# Altium PCB Rect.PcbDoc
Units mil, origin at the board's own origin, x right, y up, seen from the top; angles counter-clockwise.
Board outline 866.14 x 1968.5 mil, 2 copper layers (Top Layer, Bottom Layer); 54 components, 30 nets, 168 pads, 81 vias.
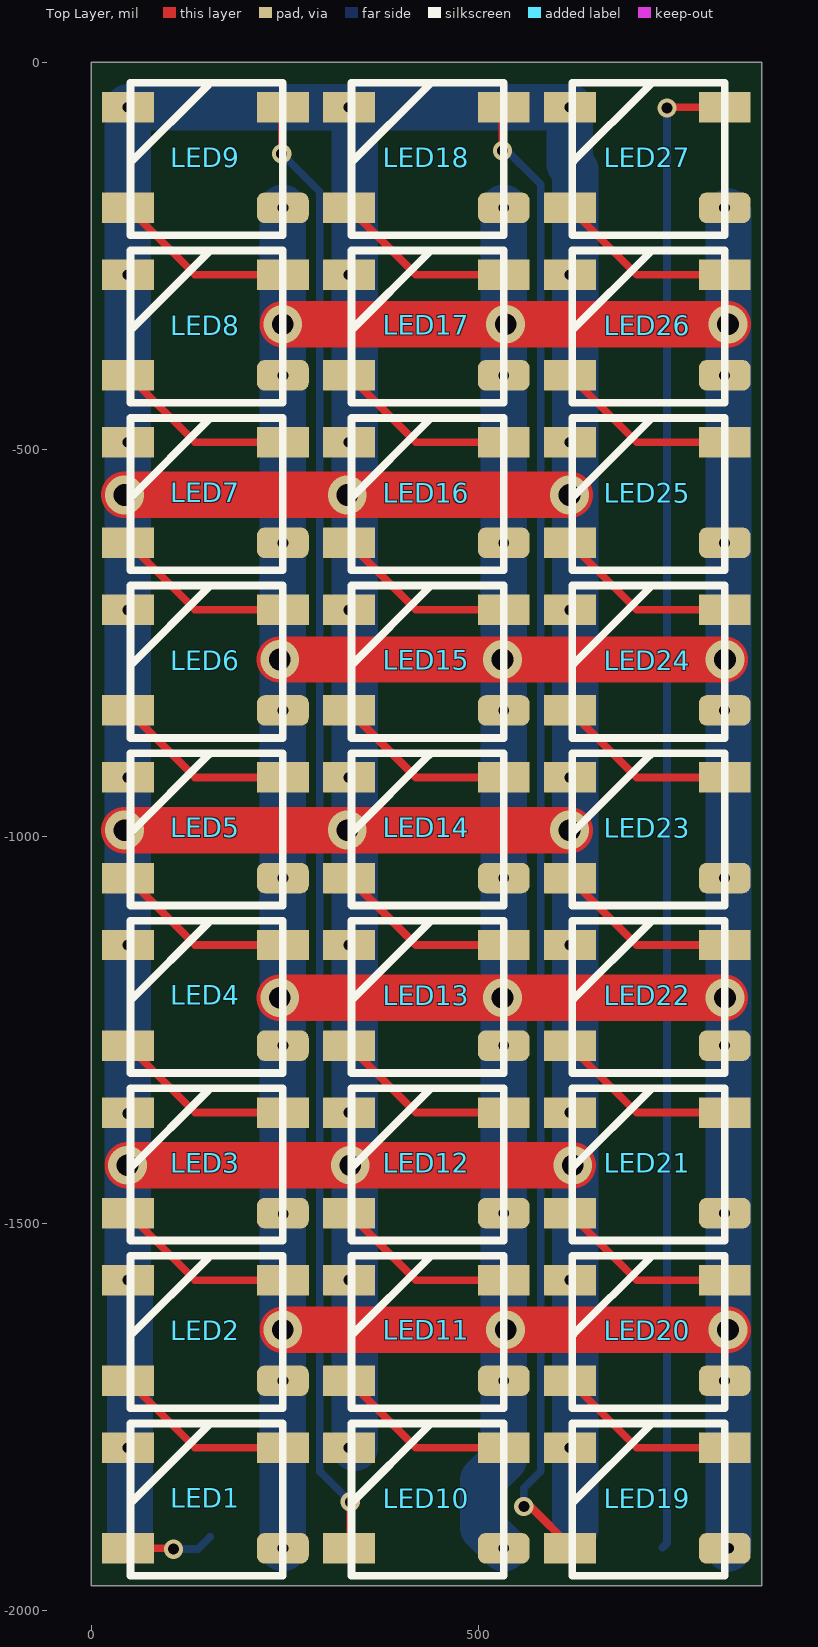
[diagram p0: Top Layer view]
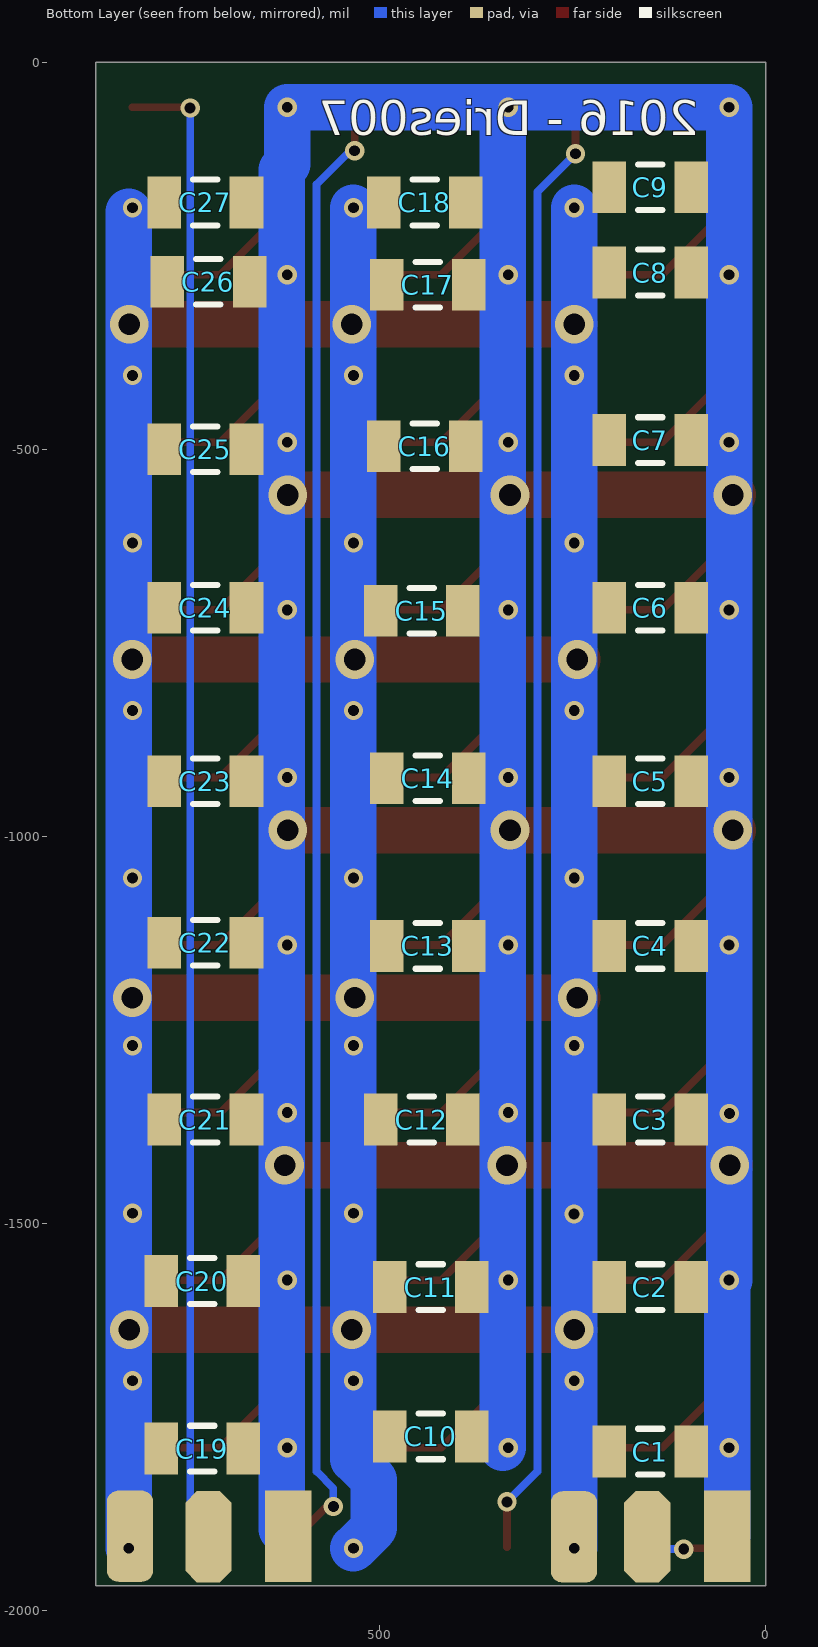
[diagram p1: Bottom Layer view, seen from below]

## Layer stack, top to bottom
Top Solder: solder mask 0.4, Solder Resist, Dk 3.5
Top Layer: signal copper 1.4
Dielectric 1: dielectric 12.6, FR-4, Dk 4.8
Bottom Layer: signal copper 1.4
Bottom Solder: solder mask 0.4, Solder Resist, Dk 3.5

## Board outline
0,-1968.5 866.14,-1968.5 866.14,0 0,0

## Design rules (kind name [scope] priority, off if disabled: settings)
Clearance [All] p1: gap=10
PolygonConnect [All] p1: connectstyle=Relief reliefconductorwidth=10 reliefentries=4 polygonreliefangle="90 Angle" airgapwidth=10
RoomDefinition Stick [InComponentClass('Stick')] p1: confinementstyle=ConfineIn formatcopy=TRUE lockcomponents=FALSE outline -1000,-5000 1000,-5000 1000,-4000 -1000,-4000
RoutingVias [All] p1: holewidth=28 width=50 viastyle="Through Hole" minholewidth=28 minwidth=50 maxholewidth=28 maxwidth=50
SolderMaskExpansion [All] p1: expansion=4
Width [All] p1: maxlimit=60 minlimit=10 preferedwidth=10 minimp=50.000000 maximp=50.000000 favimp=50.000000
30 further rules are at their usual default settings.

## Classes and differential pairs
component class Stick: C1 C2 C3 C4 C5 C6 C7 C8 LED1 LED2 LED3 LED4 LED5 LED6 LED7 LED8
component class Rect: C9 C10 C11 C12 C13 C14 C15 C16 C17 C18 C19 C20 C21 C22 C23 C24 C25 C26 C27 LED9 LED10 LED11 LED12 LED13 LED14 LED15 LED16 LED17 LED18 LED19 LED20 LED21 LED22 LED23 LED24 LED25 LED26 LED27

## Components (designator, comment, footprint, x,y, rotation, side; value= is the part's Value field where it differs from the comment)
C1 "" C1206 149.61,-1795.28 r0 bottom
C2 "" C1206 149.61,-1582.68 r0 bottom
C3 "" C1206 149.61,-1366.14 r0 bottom
C4 "" C1206 149.61,-1141.73 r0 bottom
C5 "" C1206 149.61,-929.13 r0 bottom
C6 "" C1206 149.61,-704.72 r0 bottom
C7 "" C1206 149.61,-488.19 r0 bottom
C8 "" C1206 149.61,-271.65 r0 bottom
C9 "" C1206 149.61,-161.42 r0 bottom
C10 "" C1206 433.07,-1775.59 r0 bottom
C11 "" C1206 433.07,-1582.68 r0 bottom
C12 "" C1206 444.88,-1366.14 r0 bottom
C13 "" C1206 437.01,-1141.73 r0 bottom
C14 "" C1206 437.01,-925.2 r0 bottom
C15 "" C1206 444.88,-708.66 r0 bottom
C16 "" C1206 440.94,-496.06 r0 bottom
C17 "" C1206 437.01,-287.4 r0 bottom
C18 "" C1206 440.94,-181.1 r0 bottom
C19 "" C1206 728.35,-1791.34 r0 bottom
C20 "" C1206 728.35,-1574.8 r0 bottom
C21 "" C1206 724.41,-1366.14 r0 bottom
C22 "" C1206 724.41,-1137.8 r0 bottom
C23 "" C1206 724.41,-929.13 r0 bottom
C24 "" C1206 724.41,-704.72 r0 bottom
C25 "" C1206 724.41,-500 r0 bottom
C26 "" C1206 720.47,-283.46 r0 bottom
C27 "" C1206 724.41,-181.1 r0 bottom
LED1 "WS2812B" WS2812B 147.64,-1860.24 r180 top
LED2 "WS2812B" WS2812B 147.64,-1643.7 r180 top
LED3 "WS2812B" WS2812B 147.64,-1427.17 r180 top
LED4 "WS2812B" WS2812B 147.64,-1210.63 r180 top
LED5 "WS2812B" WS2812B 147.64,-994.09 r180 top
LED6 "WS2812B" WS2812B 147.64,-777.56 r180 top
LED7 "WS2812B" WS2812B 147.64,-561.02 r180 top
LED8 "WS2812B" WS2812B 147.64,-344.49 r180 top
LED9 "WS2812B" WS2812B 147.64,-127.95 r180 top
LED10 "WS2812B" WS2812B 433.07,-1860.24 r180 top
LED11 "WS2812B" WS2812B 433.07,-1643.7 r180 top
LED12 "WS2812B" WS2812B 433.07,-1427.17 r180 top
LED13 "WS2812B" WS2812B 433.07,-1210.63 r180 top
LED14 "WS2812B" WS2812B 433.07,-994.09 r180 top
LED15 "WS2812B" WS2812B 433.07,-777.56 r180 top
LED16 "WS2812B" WS2812B 433.07,-561.02 r180 top
LED17 "WS2812B" WS2812B 433.07,-344.49 r180 top
LED18 "WS2812B" WS2812B 433.07,-127.95 r180 top
LED19 "WS2812B" WS2812B 718.5,-1860.24 r180 top
LED20 "WS2812B" WS2812B 718.5,-1643.7 r180 top
LED21 "WS2812B" WS2812B 718.5,-1427.17 r180 top
LED22 "WS2812B" WS2812B 718.5,-1210.63 r180 top
LED23 "WS2812B" WS2812B 718.5,-994.09 r180 top
LED24 "WS2812B" WS2812B 718.5,-777.56 r180 top
LED25 "WS2812B" WS2812B 718.5,-561.02 r180 top
LED26 "WS2812B" WS2812B 718.5,-344.49 r180 top
LED27 "WS2812B" WS2812B 718.5,-127.95 r180 top

## Footprints (in the part's own frame and the unit in brackets; to place one, negate y for a bottom-side part, rotate by r counter-clockwise, add the part's x,y. Pads: shape width x height; smd on the part's side, far side on the other; paste and mask are expansions set on the pad)
C1206 [mm] "Chip Capacitor, Body 3.2x1.6mm, IPC High Density"
  rect 1.1x1.7 smd: 1(-1.35,0) 2(1.35,0)
  silkscreen extent -0.4,-0.75 0.4,0.75, body extent -1.7,-0.9 1.7,0.9, height 1.3
WS2812B [mm]
  rrect50% 1.7x1 smd: 1(-2.54,1.524)
  rect 1.7x1 smd: 2(-2.54,-1.778) 3(2.54,-1.778) 4(2.54,1.524)
  silkscreen extent -2.54,-2.58 2.46,2.42

## Part data
C1 C2 C3 C4 C5 C6 C7 C8 C9 C10 C11 C12 C13 C14 C15 C16 C17 C18 C19 C20 C21 C22 C23 C24 C25 C26 C27: library part Cap, "Capacitor"

## Free pads (board coordinates)
  rrect50% 60x118.11 smd far side: 0(248.03,-1905.51) 0(821.77,-1904.45)
  oct 60x118.11 smd far side: 1(153.46,-1905.43) 1(720.39,-1905.43)
  rect 60x118.11 smd far side: 2(50.12,-1904.45) 2(617.05,-1904.45)

## Via types
v1: diameter 25, hole 14, Top Layer to Bottom Layer, tented both sides, 55 vias
v2: diameter 50, hole 28, Top Layer to Bottom Layer, tented both sides, 21 vias
v3: diameter 25, hole 14.02, Top Layer to Bottom Layer, tented both sides, 5 vias

## Nets (pads, with @x,y where several pads share a name; then routed paths per layer and width w, separated by ;. In a path a pad name is that pad's centre, name@x,y a point inside that pad or via, vN(x,y) a via of type N, cw(c..) or ccw(c..) an arc to the next point about the centre after c; other vN are vias at no path point)
DIN: LED1.4 pad.1@153.46,-1905.43 | length 112.9
  Top Layer w10: LED1.4 105.28,-1920.24 v1(106.3,-1921.26)
  Bottom Layer w10: v1(106.3,-1921.26) 137.63,-1921.26 141.57,-1917.32 pad.1@153.54,-1905.35
DOUT: LED8.2 LED9.4 | length 235.8
  Top Layer w10: LED9.4 134.17,-274.49 LED8.2
DOUT2: LED27.2 pad.1@720.39,-1905.43 | length 1937.5
  Top Layer w10: v3(744.09,-59.06) 745.2,-57.95 LED27.2
  Bottom Layer w10: pad.1@738.19,-1919.29 744.09,-1913.39 v3(744.09,-59.06)
GND: C1.1 C2.1 C3.1 C4.1 C5.1 C6.1 C7.1 C8.1 C9.1 C10.1 C11.1 C12.1 C13.1 C14.1 C15.1 C16.1 C17.1 C18.1 C19.1 C20.1 C21.1 C22.1 C23.1 C24.1 C25.1 C26.1 C27.1 LED1.3 LED2.3 LED3.3 LED4.3 LED5.3 LED6.3 LED7.3 LED8.3 LED9.3 LED10.3 LED11.3 LED12.3 LED13.3 LED14.3 LED15.3 LED16.3 LED17.3 LED18.3 LED19.3 LED20.3 LED21.3 LED22.3 LED23.3 LED24.3 LED25.3 LED26.3 LED27.3 pad.2 | length 7719.8
  Top Layer w60: v2(42.91,-992.13) v2(330.71,-992.13) v2(618.11,-992.13) ; v2(42.91,-559.06) v2(330.71,-559.06) v2(618.11,-559.06) ; v2(46.85,-1425.2) v2(334.65,-1425.2) v2(622.05,-1425.2)
  Bottom Layer w60: v1@47.24,-58.35 47.24,-1573.31 v1(47.64,-1573.7) 50.12,-1576.18 pad.2@50.12,-1904.45 ; v1(47.64,-57.95) v1(333.07,-57.95) ; v1@340.28,-1790.24 340.28,-65.16 v1(333.07,-57.95) ; pad.2@625.71,-1895.79 625.71,-138.84 618.5,-131.64 v1(618.5,-57.95) v1(333.07,-57.95)
  other v1: 47.64,-1790.24 333.07,-1790.24 618.5,-1790.24 333.07,-1573.7 618.5,-1573.7 47.24,-1358.27 333.07,-1357.17 618.5,-1357.17 47.64,-1140.63 333.07,-1140.63 618.5,-1140.63 47.64,-924.09 333.07,-924.09 618.5,-924.09 47.64,-707.56 333.07,-707.56 618.5,-707.56 47.64,-491.02 333.07,-491.02 618.5,-491.02 47.64,-274.49 333.07,-274.49 618.5,-274.49
NetLED1_2: LED1.2 LED2.4 | length 235.8
  Top Layer w10: LED2.4 134.17,-1790.24 LED1.2
NetLED2_2: LED2.2 LED3.4 | length 235.8
  Top Layer w10: LED3.4 134.17,-1573.7 LED2.2
NetLED3_2: LED3.2 LED4.4 | length 235.8
  Top Layer w10: LED4.4 134.17,-1357.17 LED3.2
NetLED4_2: LED4.2 LED5.4 | length 235.8
  Top Layer w10: LED5.4 134.17,-1140.63 LED4.2
NetLED5_2: LED5.2 LED6.4 | length 235.8
  Top Layer w10: LED6.4 134.17,-924.09 LED5.2
NetLED6_2: LED6.2 LED7.4 | length 235.8
  Top Layer w10: LED7.4 134.17,-707.56 LED6.2
NetLED7_2: LED7.2 LED8.4 | length 235.8
  Top Layer w10: LED8.4 134.17,-491.02 LED7.2
NetLED9_2: LED9.2 LED10.4 | length 1898.1
  Top Layer w10: v3(246.06,-118.11) 246.06,-59.53 LED9.2 ; LED10.4@334.65,-1918.66 v3(334.65,-1860.24)
  Bottom Layer w10: v3(246.06,-118.11) 295.28,-167.32 295.28,-1820.87 v3(334.65,-1860.24)
NetLED10_2: LED10.2 LED11.4 | length 235.8
  Top Layer w10: LED11.4 419.61,-1790.24 LED10.2
NetLED11_2: LED11.2 LED12.4 | length 235.8
  Top Layer w10: LED12.4 419.61,-1573.7 LED11.2
NetLED12_2: LED12.2 LED13.4 | length 235.8
  Top Layer w10: LED13.4 419.61,-1357.17 LED12.2
NetLED13_2: LED13.2 LED14.4 | length 235.8
  Top Layer w10: LED14.4 419.61,-1140.63 LED13.2
NetLED14_2: LED14.2 LED15.4 | length 235.8
  Top Layer w10: LED15.4 419.61,-924.09 LED14.2
NetLED15_2: LED15.2 LED16.4 | length 235.8
  Top Layer w10: LED16.4 419.61,-707.56 LED15.2
NetLED16_2: LED16.2 LED17.4 | length 235.8
  Top Layer w10: LED17.4 419.61,-491.02 LED16.2
NetLED17_2: LED17.2 LED18.4 | length 235.8
  Top Layer w10: LED18.4 419.61,-274.49 LED17.2
NetLED18_2: LED18.2 LED19.4 | length 1935.9
  Top Layer w10: v3(531.5,-114.17) 531.5,-56.38 LED18.2 ; v3(559.06,-1866.14) 567.56,-1866.14 LED19.4@620.08,-1918.66
  Bottom Layer w10: v3(531.5,-114.17) 531.5,-108.27 580.71,-157.48 580.71,-1820.87 559.06,-1842.52 v3(559.06,-1866.14)
NetLED19_2: LED19.2 LED20.4 | length 235.8
  Top Layer w10: LED20.4 705.04,-1790.24 LED19.2
NetLED20_2: LED20.2 LED21.4 | length 235.8
  Top Layer w10: LED21.4 705.04,-1573.7 LED20.2
NetLED21_2: LED21.2 LED22.4 | length 235.8
  Top Layer w10: LED22.4 705.04,-1357.17 LED21.2
NetLED22_2: LED22.2 LED23.4 | length 235.8
  Top Layer w10: LED23.4 705.04,-1140.63 LED22.2
NetLED23_2: LED23.2 LED24.4 | length 235.8
  Top Layer w10: LED24.4 705.04,-924.09 LED23.2
NetLED24_2: LED24.2 LED25.4 | length 235.8
  Top Layer w10: LED25.4 705.04,-707.56 LED24.2
NetLED25_2: LED25.2 LED26.4 | length 235.8
  Top Layer w10: LED26.4 705.04,-491.02 LED25.2
NetLED26_2: LED26.2 LED27.4 | length 235.8
  Top Layer w10: LED27.4 705.04,-274.49 LED26.2
VCC: C1.2 C2.2 C3.2 C4.2 C5.2 C6.2 C7.2 C8.2 C9.2 C10.2 C11.2 C12.2 C13.2 C14.2 C15.2 C16.2 C17.2 C18.2 C19.2 C20.2 C21.2 C22.2 C23.2 C24.2 C25.2 C26.2 C27.2 LED1.1 LED2.1 LED3.1 LED4.1 LED5.1 LED6.1 LED7.1 LED8.1 LED9.1 LED10.1 LED11.1 LED12.1 LED13.1 LED14.1 LED15.1 LED16.1 LED17.1 LED18.1 LED19.1 LED20.1 LED21.1 LED22.1 LED23.1 LED24.1 LED25.1 LED26.1 LED27.1 pad.0@248.03,-1905.51 | length 7514.6
  Top Layer w60: v2(243.7,-1208.66) v2(531.5,-1208.66) v2(818.9,-1208.66) ; v2(243.7,-771.65) v2(531.5,-771.65) v2(818.9,-771.65) ; v2(247.64,-1637.8) v2(535.43,-1637.8) v2(822.83,-1637.8) ; v2(247.64,-338.58) v2(535.43,-338.58) v2(822.83,-338.58)
  Bottom Layer w60: v1(247.64,-1920.24) v1(247.64,-1703.7) v1(247.64,-1270.63) v1(247.64,-1054.09) v1(247.64,-837.56) v1(247.64,-621.02) v1(247.64,-404.49) v2(247.64,-338.58) v1(247.64,-187.95) ; v1(533.07,-1920.24) 506.56,-1893.72 506.56,-1831.38 533.07,-1804.86 v1(533.07,-1703.7) v1(533.07,-1487.17) v1(533.07,-1270.63) v1(533.07,-1054.09) v1(533.07,-837.56) v1(533.07,-621.02) v1(533.07,-404.49) v1(533.07,-187.95) ; v1(823.5,-1920.24) v1@823.5,-192.95
  other v1: 818.5,-1703.7 248.03,-1488.19 818.5,-1487.17 818.5,-1270.63 818.5,-1054.09 818.5,-837.56 818.5,-621.02 818.5,-404.49 818.5,-187.95

## Silkscreen, mask and mechanical layers (free items; w line width, h text height)
Bottom Overlay:
  text "2016 - Dries007" at 86.61,-94.49 h45
Mechanical 1:
  the board outline again, w10